# Altium PCB PCI_ASTROPIX_carrier.PcbDoc (part 2 of 2)
Units mil, origin at the board's own origin, x right, y up, seen from the top; angles counter-clockwise.
Board outline 2019.69 x 2347.68 mil, 4 copper layers (Top Layer, gnd, HV_vss, Bottom Layer); 70 components, 61 nets, 417 pads, 93 vias.
Unrouted connection lines stored in the file: 4.
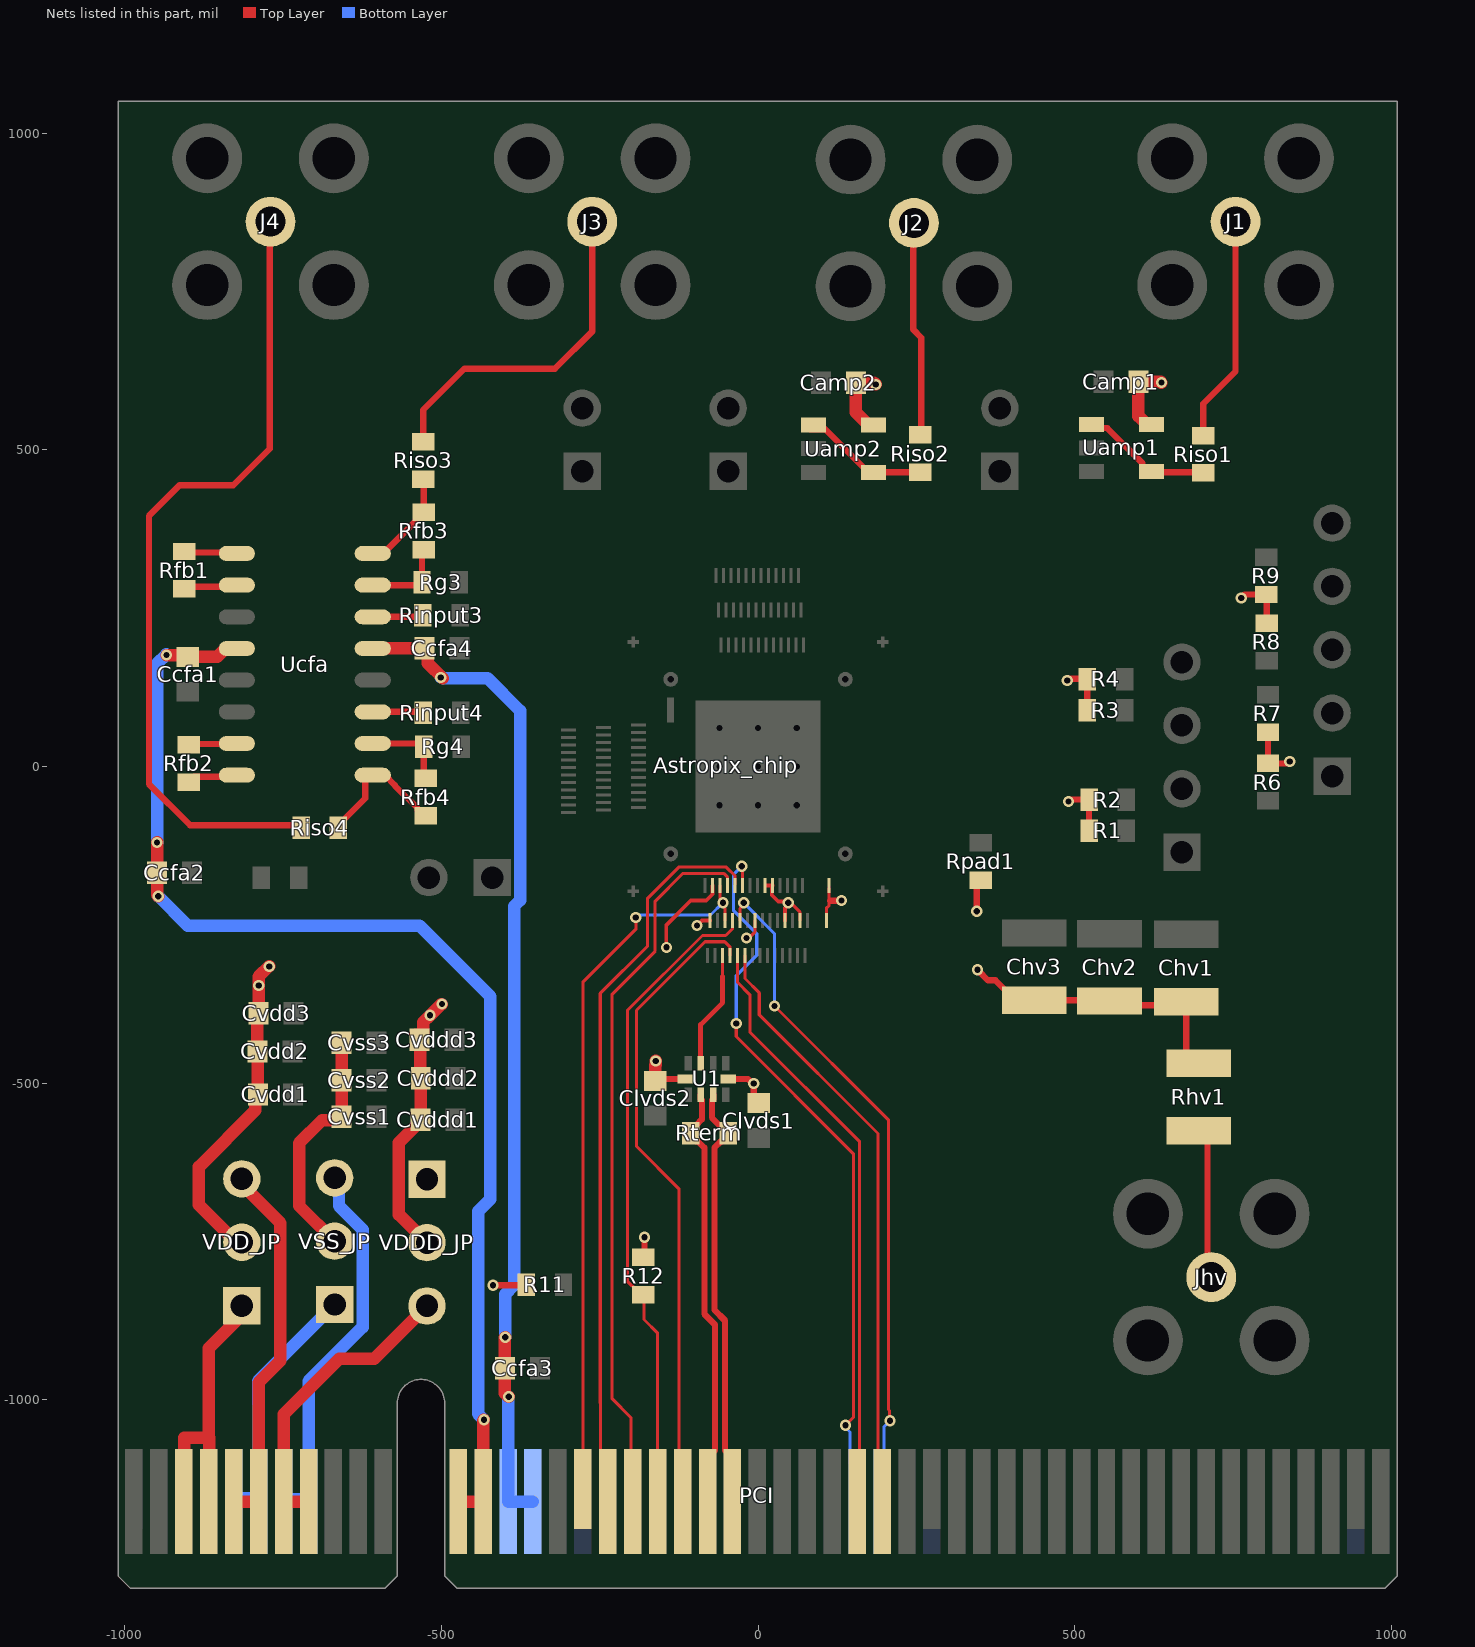
[diagram p4: the nets of this part, all layers, seen from the top]

## Via types
v1: diameter 17.72, hole 9.84, Top Layer to Bottom Layer, 87 vias
v2: diameter 122.05, hole 122.05, Top Layer to Bottom Layer, 4 vias
v3: diameter 78.74, hole 78.74, Top Layer to Bottom Layer, 2 vias

## Nets (pads, with @x,y where several pads share a name; then routed paths per layer and width w, separated by ;. In a path a pad name is that pad's centre, name@x,y a point inside that pad or via, vN(x,y) a via of type N, cw(c..) or ccw(c..) an arc to the next point about the centre after c; other vN are vias at no path point) (continued)
NetJ1_1: J1.1 Riso1.2 | length 358.8
  Top Layer w10: Riso1.2@702.76,522.64 702.76,572.83 753.94,624.02 J1.1@753.94,860.24
NetJ2_1: J2.1 Riso2.2 | length 328.5
  Top Layer w10: J2.1@244.09,858.27 245.08,857.28 245.08,689.96 257.87,677.17 Riso2.2@257.87,535.43
NetJ3_1: J3.1 Riso3.2 | length 538.7
  Top Layer w9.84: Riso3.2@-528.54,512.8 -528.54,562.99 -463.58,627.95 -320.73,627.95 -261.81,686.87 J3.1@-261.81,857.28
NetJ4_1: J4.1 Riso4.2 | length 1290.1
  Top Layer w10: J4.1@-770.67,865.16 -770.67,501.97 -828.74,443.9 -913.39,443.9 -961.61,395.67 -961.61,-27.56 -896.65,-92.52 -725.39,-92.52 Riso4.2@-721.46,-96.46
NetJhv_1: Jhv.1 Rhv1.2 | length 244.4
  Top Layer w10: Rhv1.2@696.93,-572.83 Rhv1.2@711.16,-587.07 ; Rhv1.2@697.91,-574.8 Rhv1.2@695.87,-574.8 709.65,-588.58 Jhv.1@709.65,-791.34
NetRfb1_1: Rfb1.1 Ucfa.1 | length 86.9
  Top Layer w9.84: Rfb1.1@-912.4,339.57 -910.83,337.99 -835.04,337.99 Ucfa.1@-828.74,331.69
NetRfb1_2: Rfb1.2 Ucfa.2 | length 92
  Top Layer w9.84: Rfb1.2@-912.4,280.51 -909.13,283.78 -825.47,283.78 Ucfa.2@-822.83,286.42
NetRfb2_1: Rfb2.1 Ucfa.8 | length 79.5
  Top Layer w9.84: Rfb2.1@-898.62,-24.61 -890.24,-16.22 -823.31,-16.22 Ucfa.8@-822.83,-15.75
NetRfb2_2: Rfb2.2 Ucfa.7 | length 72.1
  Top Layer w9.84: Rfb2.2@-898.62,34.45 -897.64,35.43 -829.72,35.43 Ucfa.7@-827.76,37.4
NetRfb3_1: Rfb3.1 Rg3.2 Ucfa.15 | length 134.3
  Top Layer w9.84: Ucfa.15@-608.27,286.42 -533.46,286.42 Rg3.2@-530.51,289.37 ; Rg3.2@-530.51,283.46 Rg3.2@-530.51,289.37 ; Rfb3.1@-527.56,337.6 -530.51,334.65 Rg3.2@-530.51,291.34 Rg3.2@-530.51,289.37
NetRfb3_2: Rfb3.2 Riso3.1 Ucfa.16 | length 165.5
  Top Layer w9.84: Ucfa.16@-608.27,336.42 -591.73,336.42 -530.51,397.64 Rfb3.2@-527.56,397.64 ; Riso3.1@-528.54,455.71 -527.56,454.72 Rfb3.2@-527.56,397.64 ; Rfb3.2@-527.56,396.65 Rfb3.2@-527.56,397.64
NetRfb4_1: Rfb4.1 Riso4.1 Ucfa.9 | length 220.5
  Top Layer w9.84: Riso4.1@-662.4,-96.46 -662.4,-92.52 -620.08,-50.2 -620.08,-19.95 -614.89,-14.76 Ucfa.9@-608.27,-14.76 ; Ucfa.9@-608.27,-13.58 -588.78,-13.58 -573.18,-29.19 -573.18,-30.17 -537.4,-65.94 -537.4,-68.9 -528.54,-77.76 Rfb4.1@-524.61,-77.76
NetRfb4_2: Rfb4.2 Rg4.2 Ucfa.10 | length 143.9
  Top Layer w9.84: Ucfa.10@-608.27,36.42 Rg4.2@-527.56,36.42 ; Rfb4.2@-526.57,-25.59 -527.56,-24.61 Rg4.2@-527.56,31.5 -527.56,34.45 Rg4.2@-525.59,36.42
NetRinput3_2: Rinput3.2 Ucfa.14 | length 81.4
  Top Layer w9.84: Ucfa.14@-608.27,236.42 -538.39,236.42 -531.5,243.31 Rinput3.2@-531.5,245.08
NetRinput4_2: Rinput4.2 Ucfa.11 | length 80.8
  Top Layer w9.84: Ucfa.11@-608.27,85.63 -607.48,86.42 -530.32,86.42 Rinput4.2@-528.54,84.65
NetRiso1_1: Riso1.1 Uamp1.1 Uamp1.4 | length 217
  Top Layer w10: Uamp1.1@526.57,540.35 532.53,534.4 551.23,534.4 606.38,479.25 606.38,472.36 617.13,461.61 Uamp1.4@624.02,461.61 ; Uamp1.4@621.06,465.55 622.05,464.57 700.79,464.57 Riso1.1@702.76,462.6
NetRiso2_1: Riso2.1 Uamp2.1 Uamp2.4 | length 208.7
  Top Layer w10: Uamp2.1@76.77,538.39 82.6,532.56 106.22,532.56 174.21,464.57 Uamp2.4@182.09,464.57 ; Uamp2.4@183.07,464.57 Riso2.1@255.91,464.57
POW4: PCI.B5 PCI.B6 VDD_JP.3 | length 574.8
  Top Layer w19.68: PCI.B5@-826.77,-1160.43 PCI.B6@-788.39,-1160.43 ; VDD_JP.3@-810.04,-660.43 -810.04,-664.76 -753.94,-720.87 -753.94,-937.99 -788.39,-972.44 PCI.B6@-788.39,-1159.29
POW5: PCI.A7 PCI.A8 VSS_JP.3 | length 603.9
  Bottom Layer w19.68: PCI.A7@-749.02,-1160.43 -745.08,-1156.5 PCI.A8@-709.65,-1156.5 ; PCI.A8@-707.68,-1156.5 PCI.A8@-709.65,-1156.5 ; VSS_JP.3@-668.47,-649.29 -661.54,-656.22 -661.54,-693.58 -624.18,-730.95 -624.18,-884.93 -709.65,-970.4 PCI.A8@-709.65,-1156.5
POW6: PCI.B7 PCI.B8 VDDD_JP.3 | length 474.3
  Top Layer w19.68: PCI.B7@-749.02,-1160.43 -711.61,-1160.43 PCI.B8@-709.65,-1158.46 ; PCI.B7@-748.62,-1159.68 -748.62,-1022.24 -661.42,-935.04 -606.1,-935.04 VDDD_JP.3@-522.64,-851.57
res_n: Astropix_chip.7 Astropix_chip.9 PCI.B17 | length 1149.2
  Top Layer w4.92: PCI.B17@-276.57,-1142.72 -276.57,-340.55 -192.91,-256.89 v1(-192.91,-238.19) ; v1@-59.84,-216.29 -52.17,-223.96 Astropix_chip.9@-52.17,-243.11 ; v1@-59.84,-215.16 v1@-59.84,-213.65 ; Astropix_chip.7@-59.84,-187.8 v1@-59.84,-213.65 ; v1(-55.12,-214.99) -56.46,-213.65 v1@-59.84,-213.65
  Bottom Layer w4.92: v1(-192.91,-238.19) -189.45,-238.19 -185.51,-234.25 -74.93,-234.25 -55.67,-214.99 v1(-55.12,-214.99)
SAMPLE_CLK: Astropix_chip.8 U1.8 | length 183.2
  Top Layer w4.92: Astropix_chip.8@-55.91,-298.03 -55.91,-330.91 -55.12,-331.69
  Top Layer w7.87: U1.8@-90.55,-466.54 -90.55,-407.48 -55.91,-372.83 -55.91,-331.69
SAMPLE_CLK_N: PCI.B23 Rterm.1 U1.3 | length 678.8
  Top Layer w9.84: U1.3@-70.87,-518.1 -70.87,-524.6 -72.84,-526.56 -72.84,-554.13 -61.02,-565.95 -56.1,-565.95 -47.24,-574.8 -47.24,-582.68 -56.1,-591.54 -58.46,-591.54 -68.9,-601.98 -68.9,-857.78 -52.17,-874.51 -52.17,-1079.72 -40.35,-1091.54 PCI.B23@-40.35,-1160.43
SAMPLE_CLK_P: PCI.B22 Rterm.2 U1.2 | length 672.7
  Top Layer w9.84: U1.2@-90.55,-518.1 -90.55,-524.6 -88.58,-526.56 -88.58,-557.09 -97.44,-565.95 -106.3,-574.8 -106.3,-582.68 -97.44,-591.54 -95.09,-591.54 -84.65,-601.98 -84.65,-864.3 -67.91,-881.03 -67.91,-1079.72 -79.72,-1091.54 PCI.B22@-79.72,-1160.43
SPI_CLK: Astropix_chip.13 PCI.B18 | length 1139
  Top Layer w4.92: PCI.B18@-233.27,-1131.89 -248.52,-1116.63 -248.52,-1005.55 -249.02,-1005.06 -249.02,-358.08 -174.21,-283.28 -174.21,-207.68 -125.3,-158.76 -50.24,-158.76 -36.21,-172.79 Astropix_chip.13@-36.21,-186.02
SPI_CSN: Astropix_chip.12 PCI.B20 R12.1 | length 1020.5
  Top Layer w4.92: R12.1@-190.94,-830.71 -190.94,-827.76 -206.2,-812.5 -206.2,-385.19 -87.74,-266.73 -51.08,-266.73 -40.35,-256.01 -40.35,-253.9 -40.16,-253.71 Astropix_chip.12@-40.16,-242.91 ; R12.1@-181.1,-833.66 -180.12,-834.65 -180.12,-873.03 -158.46,-894.68 PCI.B20@-158.46,-1160.43
SPI_MISO: Astropix_chip.10 PCI.B19 | length 1100.9
  Top Layer w4.92: PCI.B19@-200.79,-1125 -200.79,-1027.56 -230.32,-998.03 -230.32,-359.25 -162.4,-291.34 -162.4,-212.6 -118.41,-168.6 -54.32,-168.6 -48.03,-174.89 Astropix_chip.10@-48.03,-187.8
SPI_MOSI: Astropix_chip.11 PCI.B21 | length 1014.9
  Top Layer w4.92: PCI.B21@-119.09,-1160.43 -125,-1154.53 -125,-666.34 -191.93,-599.41 -191.93,-384.84 -83.66,-276.57 -52.65,-276.57 -44.09,-285.13 Astropix_chip.11@-44.09,-298.03
SR_CK1: Astropix_chip.14 PCI.B28 | length 907.1
  Top Layer w4.92: Astropix_chip.14@-32.48,-297.24 -32.48,-340.55 -12.8,-360.24 -12.8,-418.96 160.43,-592.19 160.43,-1123.03 PCI.B28@159.45,-1124.02
SR_CK2: Astropix_chip.15 PCI.A29 | length 1024.7
  Top Layer w4.92: Astropix_chip.15@-28.35,-242.91 -28.35,-223.95 -22.64,-218.24 v1(-22.64,-215.16) ; v1(26.08,-377.95) 205.71,-557.58 205.71,-1014.76 207.55,-1016.6 207.55,-1032.2 v1(208.19,-1032.84)
  Bottom Layer w4.92: v1(-22.64,-215.16) 26.08,-263.88 v1(26.08,-377.95) ; PCI.A29@198.82,-1110.24 198.82,-1042.21 v1(208.19,-1032.84)
SR_LOAD: Astropix_chip.16 PCI.A28 | length 1112.4
  Top Layer w4.92: v1(-34.45,-405.51) -34.45,-426.18 150.59,-611.22 150.59,-1027.58 v1(138.16,-1040.02) ; v1(-25.59,-157.48) -24.61,-158.47 Astropix_chip.16@-24.61,-187.99
  Bottom Layer w4.92: v1(-34.45,-405.51) -34.45,-330.3 -2.07,-297.92 -2.07,-263.73 -38.88,-226.92 -38.88,-170.77 v1(-25.59,-157.48) ; v1(138.16,-1040.02) 138.16,-1043.48 145.18,-1050.49 145.18,-1099.9 PCI.A28@159.45,-1114.17
SR_SIN: Astropix_chip.17 PCI.B29 | length 897
  Top Layer w4.92: Astropix_chip.17@-20.67,-298.23 -20.67,-334.65 1.97,-357.28 1.97,-391.73 189.47,-579.23 189.47,-1094.98 PCI.B29@198.82,-1104.33
sub_board: Astropix_chip.43 Astropix_chip.44 Chv1.2 Chv2.2 Chv3.2 Rhv1.1 Rpad1.1 | length 536.8
  Top Layer w4.92: Astropix_chip.44@107.87,-233.56 107.87,-223.72 112.32,-219.27 112.32,-211.61 ; 112.2,-211.61 112.32,-211.61 ; Astropix_chip.43@112.2,-191.46 112.32,-191.57 112.32,-211.61
  Top Layer w10: 114.17,-211.61 v1(131.89,-211.61) ; v1(345.47,-228.35) 345.47,-181.1 Rpad1.1@352.36,-174.21 ; v1@348.43,-319.88 348.43,-322.83 362.98,-337.39 374.79,-337.39 406.5,-369.09 Chv3.2@436.02,-369.09 Chv2.2@532.48,-369.09 ; Chv2.2@554.13,-376.97 661.42,-376.97 676.18,-391.73 676.18,-451.85 689.88,-465.55 Rhv1.1@691.93,-465.55
  Bottom Layer w10: v1(131.89,-211.61) v1@133.98,-211.61
  other v1: 346.46,-320.87
vcfa_neg: Ccfa3.2 Ccfa4.2 PCI.A14 PCI.A15 Ucfa.13 | length 1586.3
  Top Layer w19.68: Ucfa.13@-608.27,186.42 -607.97,186.71 Ccfa4.2@-530.81,186.71 ; Ccfa4.2@-526.57,187.01 -521.06,181.49 -521.06,162.79 v1@-497.76,139.5 ; v1(-398.93,-900.85) -399.61,-901.53 Ccfa3.2@-399.61,-949.8 -399.61,-989.17 v1(-393.7,-995.08)
  Bottom Layer w19.68: v1(-500.98,140.75) -498.57,140.75 -497.32,139.5 -427.08,139.5 -375.39,87.81 -375.39,-210.84 -384.84,-220.29 -384.84,-818.84 -398.93,-832.92 v1(-398.93,-900.85) ; PCI.A14@-394.68,-1160.43 PCI.A14@-394.68,-1156.5 ; v1@-394.68,-995.08 PCI.A14@-394.68,-1156.5 ; PCI.A15@-355.31,-1160.43 -390.75,-1160.43 PCI.A14@-394.68,-1156.5
vcfa_pos: Ccfa1.2 Ccfa2.2 PCI.B12 PCI.B13 Ucfa.4 | length 1960.4
  Top Layer w9.84: Ccfa1.2@-902.42,176.04 Ccfa1.2@-900.59,174.21 ; Ucfa.4@-830.71,187.01 Ucfa.4@-827.76,189.96 ; Ucfa.4@-829.72,186.42 -827.36,186.42 Ucfa.4@-826.77,187.01
  Top Layer w19.68: v1@-948.82,-119.09 v1(-948.82,-120.08) Ccfa2.2@-948.82,-167.32 -948.82,-202.76 v1(-946.85,-204.72) ; v1(-933.86,176.04) -902.42,176.04 -900.73,176.04 Ccfa1.2@-899.61,177.17 ; Ccfa1.2@-900.59,173.23 -853.82,173.23 -840.04,187.01 -830.71,187.01 -826.77,187.01 Ucfa.4@-820.87,187.01 ; PCI.B12@-473.43,-1160.43 -437.01,-1160.43 PCI.B13@-434.06,-1157.48 ; PCI.B13@-434.05,-1160.43 -434.05,-1032.66 v1(-432.66,-1031.27)
  Bottom Layer w19.68: v1(-948.82,-120.08) -948.82,162.4 v1@-934.06,177.17 ; v1(-946.85,-204.72) -900.59,-250.98 -534.45,-250.98 -422.44,-362.99 -422.44,-682.75 -441.93,-702.24 -441.93,-1022.01 v1(-432.66,-1031.27)
VDD18: PCI.B3 PCI.B4 VDD_JP.1 | length 448.2
  Top Layer w19.68: PCI.B3@-906.1,-1159.68 -906.1,-1059.68 -866.73,-1059.68 ; PCI.B4@-866.73,-1159.68 -866.73,-1059.68 ; VDD_JP.1@-819.88,-870.67 -819.88,-871.06 -867.13,-918.31 -867.13,-1059.29 -866.73,-1059.68
  Bottom Layer w19.68: VDD_JP.1@-801.06,-868.98 VDD_JP.1@-800.94,-868.98
vdd_board: Astropix_chip.3 Astropix_chip.25 Astropix_chip.28 Astropix_chip.33 Astropix_chip.39 Camp1.2 Camp2.2 Cvdd1.2 Cvdd2.2 Cvdd3.2 Uamp1.5 Uamp2.5 VDD_JP.2 VDDD_JP.1 | length 916.9
  Top Layer w5: v1@54.24,-217.42 66.18,-229.36 66.18,-242.87 Astropix_chip.39@66.14,-242.91
  Top Layer w5.91: v1(-96.46,-250.98) -88.39,-242.91 Astropix_chip.3@-75.58,-242.91 ; Astropix_chip.25@12.8,-187.8 Astropix_chip.28@22.84,-187.8 ; Astropix_chip.28@21.65,-187.99 21.65,-202.76 31.8,-212.9 45.38,-212.9 v1(47.64,-215.16) ; Astropix_chip.33@42.51,-242.91 42.51,-223.48 v1@48.23,-217.76 ; v1@51.08,-217.42 v1@54.24,-217.42
  Top Layer w19.68: VDD_JP.2@-814.96,-759.84 -882.87,-691.93 -882.87,-631.89 -793.9,-542.92 -793.9,-522.25 Cvdd1.2@-789.37,-517.72 -789.86,-517.22 Cvdd2.2@-789.86,-446.36 ; Cvdd2.2@-790.35,-445.87 Cvdd3.2@-790.35,-382.87 ; Cvdd3.2@-788.39,-389.76 v1(-788.39,-345.47) -788.39,-331.69 v1@-771.65,-314.96 ; v1(186.02,603.35) 183.06,606.31 Camp2.2@154.53,606.31 154.53,559.05 175.2,538.39 Uamp2.5@187.01,538.39 ; Camp1.2@600.39,607.29 635.83,607.29 v1(636.81,606.31) ; Camp1.2@600.39,613.19 600.39,553.15 612.2,541.34 Uamp1.5@627.95,541.34
  other v1: -771.7,-315.58
vddd_board: Astropix_chip.4 Astropix_chip.21 Clvds1.2 Clvds2.2 Cvddd1.2 Cvddd2.2 Cvddd3.2 R1.2 R2.2 R3.2 R4.2 R6.2 R7.2 R8.2 R9.2 R11.2 R12.2 U1.5 U1.10 VDDD_JP.2 | length 1204.8
  Top Layer w5: v1(-18.31,-270.67) -17.9,-270.26 -13.78,-270.26 -4.92,-261.41 -4.92,-253.85 -4.76,-253.69 -4.76,-242.95 Astropix_chip.21@-4.72,-242.91
  Top Layer w5.91: v1(-144.68,-285.43) -144.68,-249.96 -106.34,-211.61 -81.87,-211.61 -71.85,-201.59 -71.85,-188 Astropix_chip.4@-71.65,-187.8
  Top Layer w9.84: v1(-418.31,-818.9) -367.13,-818.9 R11.2@-366.14,-817.91 ; R12.2@-181.1,-774.61 -179.13,-772.64 v1(-179.13,-743.11) ; Clvds2.2@-165.35,-491.14 -163.4,-493.1 -162.41,-493.1 U1.10@-114.57,-493.1 ; U1.5@-48.22,-493.1 U1.5@-46.85,-493.1 -16.12,-493.1 -9.02,-500.2 v1(-6.89,-500.2) -6.89,-524.61 Clvds1.2@0,-531.5 ; v1(488.19,135.83) 490.32,135.83 493.28,138.79 R4.2@519.68,138.79 ; v1(490.12,-55.01) 492.96,-52.17 R2.2@522.64,-52.17 ; R4.2@518.7,138.78 R4.2@519.68,137.79 R3.2@519.68,88.58 ; R1.2@522.64,-101.38 R2.2@522.64,-53.15 ; v1(762.75,265.96) 768.44,271.65 R9.2@802.17,271.65 ; R8.2@799.73,229.79 R8.2@803.15,226.38 803.15,274.61 R9.2@802.17,275.59 ; R7.2@804.13,55.12 R7.2@805.12,54.13 R6.2@805.12,4.92 834.48,4.92 837.44,7.87 v1(839.57,7.87)
  Top Layer w19.68: Cvddd3.2@-540.35,-423.23 -534.45,-429.13 Cvddd3.2@-534.45,-431.1 -528.54,-425.2 -528.54,-403.54 v1(-517.72,-392.72) -500,-375 v1(-499.02,-375) ; Cvddd3.2@-535.93,-432.58 -533.46,-435.04 -533.46,-491.14 Cvddd2.2@-532.74,-491.86 ; Cvddd1.2@-533,-557.93 -532.74,-557.66 Cvddd2.2@-532.74,-491.86 ; Cvddd1.2@-532.48,-557.66 -532.48,-559.37 -566.93,-593.82 -566.93,-707.28 VDDD_JP.2@-522.64,-751.57 ; Cvddd2.2@-532.48,-492.13 Cvddd2.2@-532.74,-491.86 ; Clvds2.2@-162.41,-493.1 -162.41,-471.47 -161.42,-470.47 v1(-161.42,-464.76)
vss_board: Cvss1.2 Cvss2.2 Cvss3.2 VSS_JP.2 | length 379.6
  Top Layer w19.68: VSS_JP.2@-668.47,-749.29 -724.41,-693.35 -724.41,-594.49 -687.99,-558.07 -663.39,-558.07 Cvss1.2@-657.48,-552.17 ; Cvss1.2@-657.48,-553.15 Cvss1.2@-657.48,-552.17 ; Cvss3.2@-657.48,-436.02 Cvss2.2@-657.48,-495.08 Cvss1.2@-657.48,-552.17
VSSA: PCI.A5 PCI.A6 VSS_JP.1 | length 404.6
  Bottom Layer w19.68: PCI.A5@-827.76,-1160.43 -827.76,-1159.45 -823.82,-1155.51 PCI.A6@-787.99,-1155.51 ; -789.37,-1004.92 -789.37,-970.19 VSS_JP.1@-668.47,-849.29 ; -787.99,-1000.59 PCI.A6@-787.99,-1155.51 ; PCI.A6@-786.42,-1155.51 PCI.A6@-787.99,-1155.51
pads on no net: Astropix_chip.1 Astropix_chip.18 Astropix_chip.19 Astropix_chip.22 Astropix_chip.23 Astropix_chip.26 Astropix_chip.30 Astropix_chip.31 Astropix_chip.41 Astropix_chip.42 Astropix_chip.45 Astropix_chip.46 Astropix_chip.48 Astropix_chip.49 Astropix_chip.50 Astropix_chip.51 Astropix_chip.52 Astropix_chip.53 Astropix_chip.54 Astropix_chip.55 Astropix_chip.56 Astropix_chip.57 Astropix_chip.58 Astropix_chip.61 Astropix_chip.62 Astropix_chip.63 Astropix_chip.64 Astropix_chip.65 Astropix_chip.68 Astropix_chip.69 Astropix_chip.70 Astropix_chip.71 Astropix_chip.72 Astropix_chip.73 Astropix_chip.74 Astropix_chip.75 Astropix_chip.76 Astropix_chip.78 Astropix_chip.79 Astropix_chip.80 Astropix_chip.81 Astropix_chip.82 Astropix_chip.85 Astropix_chip.86 Astropix_chip.87 Astropix_chip.88 Astropix_chip.89 Astropix_chip.90 Astropix_chip.91 Astropix_chip.92 Astropix_chip.93 Astropix_chip.95 Astropix_chip.96 Astropix_chip.97 Astropix_chip.98 Astropix_chip.99 Astropix_chip.100 Astropix_chip.101 Astropix_chip.102 Astropix_chip.103 Astropix_chip.105 Astropix_chip.106 Astropix_chip.107 Astropix_chip.108 Astropix_chip.109 Astropix_chip.110 Astropix_chip.111 Astropix_chip.112 Astropix_chip.115 Astropix_chip.116 Astropix_chip.p PCI.A1 PCI.A2 PCI.A3 PCI.A4 PCI.A9 PCI.A10 PCI.A12 PCI.A13 PCI.A17 PCI.A18 PCI.A19 PCI.A20 PCI.A21 PCI.A22 PCI.A23 PCI.A24 PCI.A25 PCI.A26 PCI.A27 PCI.A30 PCI.A31 PCI.A32 PCI.A33 PCI.A34 PCI.A35 PCI.A37 PCI.A38 PCI.A39 PCI.A40 PCI.A41 PCI.A42 PCI.A43 PCI.A44 PCI.A45 PCI.A46 PCI.A47 PCI.A48 PCI.A49 PCI.B1 PCI.B2 PCI.B9 PCI.B10 PCI.B14 PCI.B15 PCI.B24 PCI.B25 PCI.B26 PCI.B27 PCI.B30 PCI.B31 PCI.B36 PCI.B37 PCI.B38 PCI.B39 PCI.B40 PCI.B41 PCI.B42 PCI.B43 PCI.B44 PCI.B45 PCI.B46 PCI.B47 PCI.B48 PCI.B49 U1.4 U1.6 U1.9
copper on no net:
  other v2: -905.51,-511.81 866.14,-511.81 -905.51,551.18 866.14,551.18
  other v3: 252.95,-154.53 -271.65,183.07

## Polygon pours and split planes (outlines as drawn)
gnd on gnd (split plane): 989.15,-795.51 989.15,-1269.47 981.24,-1277.38 -466.68,-1277.38 -474.59,-1269.47 -474.59,-1005 -474.6,-1004.85 -474.96,-998.56 -476.04,-992.21 -477.82,-986.01 -480.29,-980.06 -483.41,-974.41 -487.14,-969.15 -491.43,-964.35 -496.24,-960.05 -501.5,-956.32 -507.14,-953.2 -513.1,-950.73 -519.29,-948.95 -525.65,-947.87 -532.09,-947.51 -538.52,-947.87 -544.88,-948.95 -551.08,-950.73 -557.03,-953.2 -562.67,-956.32 -567.93,-960.05 -572.74,-964.35 -577.04,-969.15 -580.77,-974.41 -583.89,-980.06 -586.35,-986.01 -588.14,-992.21 -589.22,-998.56 -589.57,-1004.85 -589.59,-1005 -589.59,-1269.47 -597.5,-1277.38 -982.42,-1277.38 -990.34,-1269.47 -990.34,-867.36 -990.34,1030.1 989.15,1030.1
NetAstropix_chip_201 on HV_vss (split plane): 335.56,1.97 335.83,-0.09 336.63,-2 337.89,-3.65 339.53,-4.91 341.45,-5.7 343.12,-5.92 368.04,-30.85 368.04,-154.19 360.14,-162.09 359.29,-161.43 357.37,-160.64 355.31,-160.37 114.51,-160.37 86.57,-132.43 86.2,-132.14 85.87,-131.8 85.38,-131.51 84.93,-131.16 84.49,-130.98 84.08,-130.74 76.62,-127.54 76.07,-127.39 75.55,-127.17 75.08,-127.11 74.62,-126.98 74.05,-126.97 73.49,-126.9 -84.65,-126.9 -85.01,-126.95 -85.38,-126.9 -115.1,-126.9 -117.06,-127.16 -117.06,120.73 -116.79,121 104.33,121 106.39,121.27 108.3,122.06 109.95,123.32 137.51,150.88 138.77,152.53 139.16,153.48 335.56,153.48
sub_board on HV_vss (split plane): 387.73,-211.95 387.73,-326.43 375.65,-338.51 332.03,-338.51 232.98,-239.46 231.33,-238.2 229.42,-237.41 227.36,-237.14 114.24,-237.14 114.24,-227.96 114.93,-226.93 115.23,-225.39 114.93,-223.86 114.24,-222.83 114.24,-176.25 352.03,-176.25
vdd_board on HV_vss (split plane): 989.15,402.64 585.63,402.64 584.09,402.33 582.79,401.46 560.15,378.82 558.68,377.35 350.43,169.1 348.43,169.36 132.87,169.36 130.82,169.09 128.9,168.3 127.26,167.03 126,165.39 125.2,163.47 124.93,161.42 125.01,160.85 101.04,136.88 -120.08,136.88 -122.13,136.61 -124.05,135.81 -125.69,134.55 -125.91,134.27 -126.19,134.06 -130.62,129.63 -131.88,127.99 -132.67,126.07 -132.94,124.02 -132.94,-130.91 -132.67,-132.96 -131.88,-134.88 -130.62,-136.52 -128.97,-137.78 -127.06,-138.58 -125,-138.85 -124.74,-138.81 -130.67,-144.74 -140.57,-154.64 -141.44,-155.94 -141.75,-157.48 -141.44,-159.02 -140.57,-160.32 -139.27,-161.19 -137.73,-161.49 -136.2,-161.19 -134.9,-160.32 -124.99,-150.41 -117.1,-142.52 -115.1,-142.78 -85.38,-142.78 -85.02,-142.74 -84.65,-142.78 71.86,-142.78 76.42,-144.74 98.55,-166.87 98.36,-168.31 98.36,-221.38 69.88,-221.38 68.35,-221.69 67.04,-222.56 66.65,-223.15 66.06,-223.54 52.58,-237.02 51.73,-236.45 50.2,-236.14 -17.72,-236.14 -19.25,-236.45 -20.55,-237.32 -53.83,-270.59 -114.57,-270.59 -115.59,-269.91 -117.13,-269.61 -119.4,-269.61 -137.61,-251.4 -137.04,-250.55 -136.73,-249.02 -137.04,-247.48 -137.91,-246.18 -139.21,-245.31 -140.75,-245 -158.46,-245 -160,-245.31 -161.3,-246.18 -162.17,-247.48 -162.31,-248.17 -246.74,-332.6 -385.24,-332.6 -386.26,-331.92 -387.8,-331.62 -506.89,-331.62 -508.43,-331.92 -509.73,-332.79 -591.42,-414.48 -592.29,-415.79 -592.6,-417.32 -592.6,-604.33 -592.29,-605.87 -591.42,-607.17 -590.12,-608.04 -588.58,-608.34 -587.05,-608.04 -586.03,-607.36 -485.82,-607.36 -484.8,-608.04 -483.27,-608.34 -478.35,-608.34 -478.09,-608.29 -468.58,-617.8 -468.58,-668.61 -511.51,-711.54 -576.77,-711.54 -578.31,-711.84 -579.61,-712.71 -580,-713.3 -580.59,-713.7 -853.23,-986.33 -854.1,-987.64 -854.41,-989.17 -854.41,-1277.38 -982.42,-1277.38 -990.34,-1269.47 -990.34,-872.96 -990.27,-872.92 -989.4,-871.61 -989.1,-870.08 -989.1,-721.46 -989.4,-719.92 -990.27,-718.62 -990.34,-718.58 -990.34,1030.1 989.15,1030.1
vddd_board on HV_vss (split plane): 989.15,-795.51 989.15,-1269.47 981.24,-1277.38 -466.68,-1277.38 -474.59,-1269.47 -474.59,-1005 -474.6,-1004.85 -474.96,-998.56 -476.04,-992.21 -477.82,-986.01 -480.29,-980.06 -483.41,-974.41 -487.14,-969.15 -491.43,-964.35 -496.24,-960.05 -501.5,-956.32 -507.14,-953.2 -513.1,-950.73 -519.29,-948.95 -525.65,-947.87 -532.09,-947.51 -538.52,-947.87 -544.88,-948.95 -551.08,-950.73 -557.03,-953.2 -562.67,-956.32 -567.93,-960.05 -572.74,-964.35 -577.04,-969.15 -580.77,-974.41 -583.89,-980.06 -586.35,-986.01 -588.14,-992.21 -589.22,-998.56 -589.57,-1004.85 -589.59,-1005 -589.59,-1269.47 -597.5,-1277.38 -846.38,-1277.38 -846.38,-990.84 -575.11,-719.57 -509.84,-719.57 -508.31,-719.26 -507,-718.39 -461.73,-673.11 -460.86,-671.81 -460.55,-670.28 -460.55,-616.14 -460.86,-614.61 -461.73,-613.3 -475.51,-599.52 -476.81,-598.65 -478.35,-598.35 -479.88,-598.65 -481.18,-599.52 -481.71,-600.31 -482.72,-599.64 -484.25,-599.33 -584.57,-599.33 -584.57,-418.99 -505.23,-339.64 -390.35,-339.64 -389.33,-340.32 -387.8,-340.63 -245.08,-340.63 -243.54,-340.32 -242.24,-339.45 -155.82,-253.03 -147.33,-253.03 -123.9,-276.46 -122.6,-277.33 -121.06,-277.64 -119.68,-277.64 -118.66,-278.31 -117.13,-278.62 -52.17,-278.62 -50.63,-278.31 -49.33,-277.44 -16.05,-244.17 47.18,-244.17 47.47,-245.63 48.34,-246.93 49.64,-247.8 51.18,-248.11 52.72,-247.8 54.02,-246.93 71.54,-229.41 98.36,-229.41 98.36,-245.08 98.63,-247.13 99.42,-249.05 100.68,-250.69 102.33,-251.96 104.24,-252.75 106.3,-253.02 224.07,-253.02 323.12,-352.07 324.77,-353.33 326.68,-354.13 328.74,-354.4 378.94,-354.4 380.99,-354.13 382.91,-353.33 384.55,-352.07 401.28,-335.34 401.29,-335.34 402,-334.41 402.55,-333.7 403.34,-331.78 403.61,-329.72 403.61,-208.66 403.34,-206.61 402.55,-204.69 401.29,-203.05 401.28,-203.05 371.47,-173.23 381.6,-163.1 382.86,-161.45 383.66,-159.54 383.93,-157.48 383.93,-27.56 383.66,-25.5 382.86,-23.59 382.31,-22.87 381.6,-21.94 352.07,7.58 351.45,8.07 351.45,154.15 352.4,154.54 354.04,155.8 355.3,157.45 356.1,159.36 356.37,161.42 356.1,163.42 565.83,373.15 587.29,394.61 989.15,394.61

## Other copper
Top Layer:
  region net sub_board: 115.16,-176.18 107.28,-176.18 97.44,-186.02 97.44,-250 102.36,-254.92 113.19,-254.92 116.14,-251.97 116.14,-177.17
HV_vss (plane layer: these items are gaps in the copper):
  pour cut-out: -516.73,112.2 -499.02,94.49 -499.02,-38.39 -509.84,-49.21 -537.4,-49.21 -555.12,-31.5 -555.12,9.84 -562.8,15.75 -632.87,15.75 -644.68,27.56 -644.68,104.33 -636.81,112.2
  pour cut-out: -633.86,214.57 -509.84,214.57 -499.02,225.39 -499.02,359.25 -510.83,371.06 -544.29,371.06 -557.09,358.27 -557.09,314.96 -566.93,305.12 -632.87,305.12 -645.67,292.32 -645.67,226.38
  lines w7.87: -993.11,-870.08 -993.11,-721.46 ; -850.39,-1289.37 -850.39,-989.17 -577.76,-716.54 ; -588.58,-604.33 -588.58,-417.32 -506.89,-335.63 -387.8,-335.63 ; -587.6,-603.35 -484.25,-603.35 -483.27,-604.33 -478.35,-604.33 ; -576.77,-715.55 -509.84,-715.55 -464.57,-670.28 -464.57,-616.14 -478.35,-602.36 ; -387.8,-336.61 -245.08,-336.61 -157.97,-249.51 ; -158.46,-249.02 -140.75,-249.02 ; -145.67,-249.02 -121.06,-273.62 -117.13,-273.62 ; -137.73,-157.48 -127.83,-147.58 -115.1,-134.84 ; -117.13,-274.61 -52.17,-274.61 -17.72,-240.16 50.2,-240.16 52.17,-242.13 ; 51.18,-244.09 68.9,-226.38 ; 69.88,-225.39 111.22,-225.39 ; 343.5,1.97 346.46,1.97 ; 348.43,161.42 562.99,375.98 ; 561.52,374.51 585.63,398.62 998.03,398.62
  lines w11.81: -130,-1297.48 -125,-1292.48
  lines w15.75: -125,-130.91 -125,124.02 -120.57,128.45 ; -120.08,128.94 104.33,128.94 131.89,156.5 ; -115.1,-134.84 -85.38,-134.84 ; -84.65,-134.84 73.49,-134.84 80.95,-138.04 111.22,-168.31 117.13,-168.31 ; 132.87,161.42 348.43,161.42 ; 343.5,1.97 343.5,158.46 ; 346.46,1.97 375.98,-27.56 375.98,-157.48 363.19,-170.28 ; 106.3,-245.08 227.36,-245.08 328.74,-346.46 378.94,-346.46 395.67,-329.72 395.67,-208.66 355.31,-168.31 106.3,-168.31 106.3,-245.08
gnd (plane layer: these items are gaps in the copper):
  rectangle: -137.8,-137.8 137.8,137.8
  pour cut-out: -516.73,112.2 -499.02,94.49 -499.02,-38.39 -509.84,-49.21 -537.4,-49.21 -555.12,-31.5 -555.12,9.84 -562.8,15.75 -632.87,15.75 -644.68,27.56 -644.68,104.33 -636.81,112.2
  pour cut-out: -633.86,214.57 -509.84,214.57 -499.02,225.39 -499.02,359.25 -510.83,371.06 -544.29,371.06 -557.09,358.27 -557.09,314.96 -566.93,305.12 -632.87,305.12 -645.67,292.32 -645.67,226.38
  lines w11.81: -865,-1297.48 -675.2,-1297.48

## Silkscreen, mask and mechanical layers (free items; w line width, h text height)
Top Overlay:
  region: 101.64,-622.62 171.71,-640.07 99.5,-640.07 cw(c177.14,-640.75)
  region: 154.26,-570 171.71,-640.07 171.71,-567.86 ccw(c172.39,-645.5)
  region: 115.42,-594.84 171.71,-640.07 106.46,-609.12 cw(c173.61,-641.3)
  region: 139.71,-575.33 ccw(c170.59,-638.32) 126.33,-583.9 171.71,-640.07
  region: 265.41,-640.07 284.99,-640.07 284.99,-584.72 298.77,-584.72 298.77,-568.66 251.63,-568.66 251.63,-584.72 265.41,-584.72 265.41,-594.05
  region: 176.41,-612.21 202.29,-640 224.06,-640 195.03,-604.51 223.92,-568.59 201.48,-568.59 176.41,-596.3 176.41,-612.21
  region: 246.94,-568.66 227.36,-568.66 227.36,-640 246.94,-640
  region: 529.79,-926.18 -84.91,-926.18 -84.91,-682.04 529.79,-682.04
  text "ASTROPIX carrier / N. Striebig / Okt. 2020" at 106.3,-555.12 h60
  text "POW4" at -863.19,-593.07 h39.37
  text "POW5" at -713.58,-593.07 h39.37
  text "ADL" at 340.55,-625.98 h60
  text "VDD" at -463.55,-638.78 h39.37
  text "Karlsruhe Institute of Technology" at 99.5,-661.59 h15.3
  text "VSSA" at -707,-929.68 h39.37
  text "POW6" at -570.87,-932.63 h39.37
  text "VDD18" at -865.12,-933.62 h39.37
Mechanical 1:
  lines w3.94: -569.49,-1005 cw(c-532.09,-1005) -494.69,-1005 ; -569.49,-1004.17 -569.49,-1277.8 -589.17,-1297.48 -990.75,-1297.48 -1010.43,-1277.8 -1010.43,-867.36 -1010.43,1050.2 1008.86,1050.2 1008.86,-797.24 ; -494.69,-1004.17 -494.69,-1277.8 -475,-1297.48 989.57,-1297.48 1009.25,-1277.8 ; 1008.86,-797.24 1008.86,-797.24